# EAGLE board 7draft_onBoard (EAGLE 8.1.0)
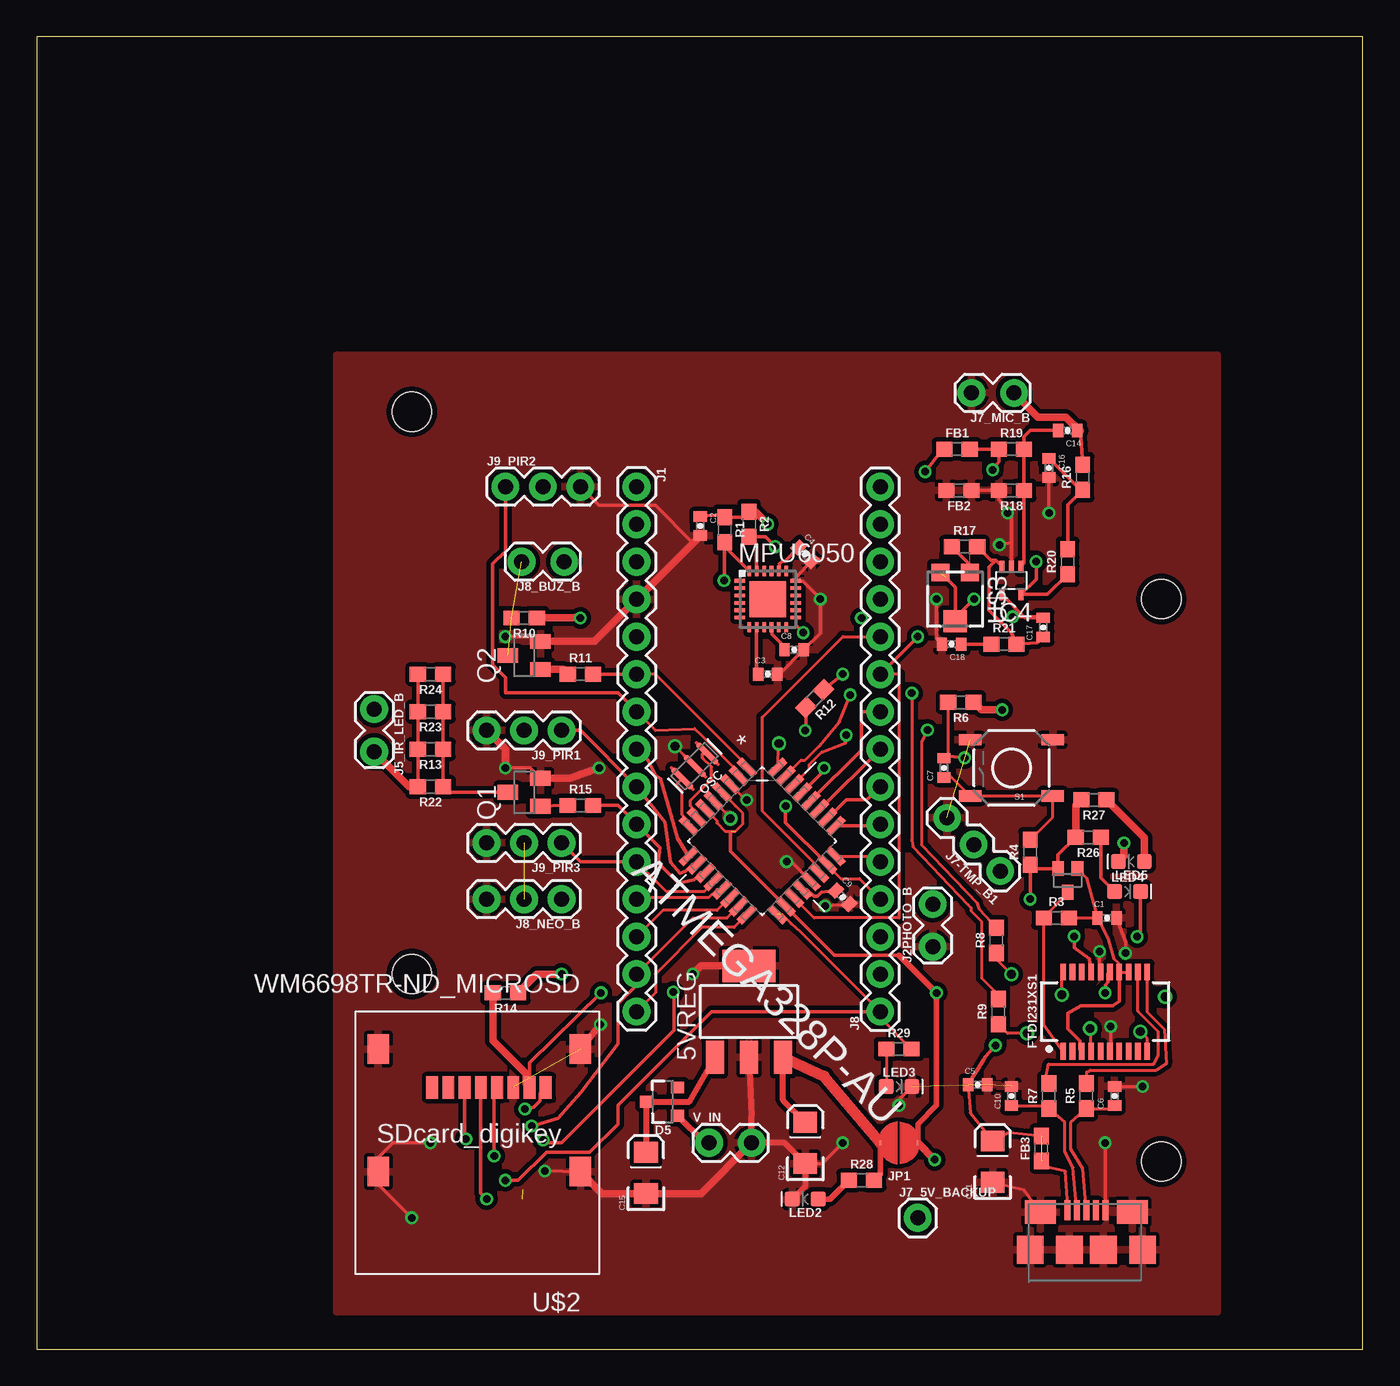
[diagram p0: board, top side]
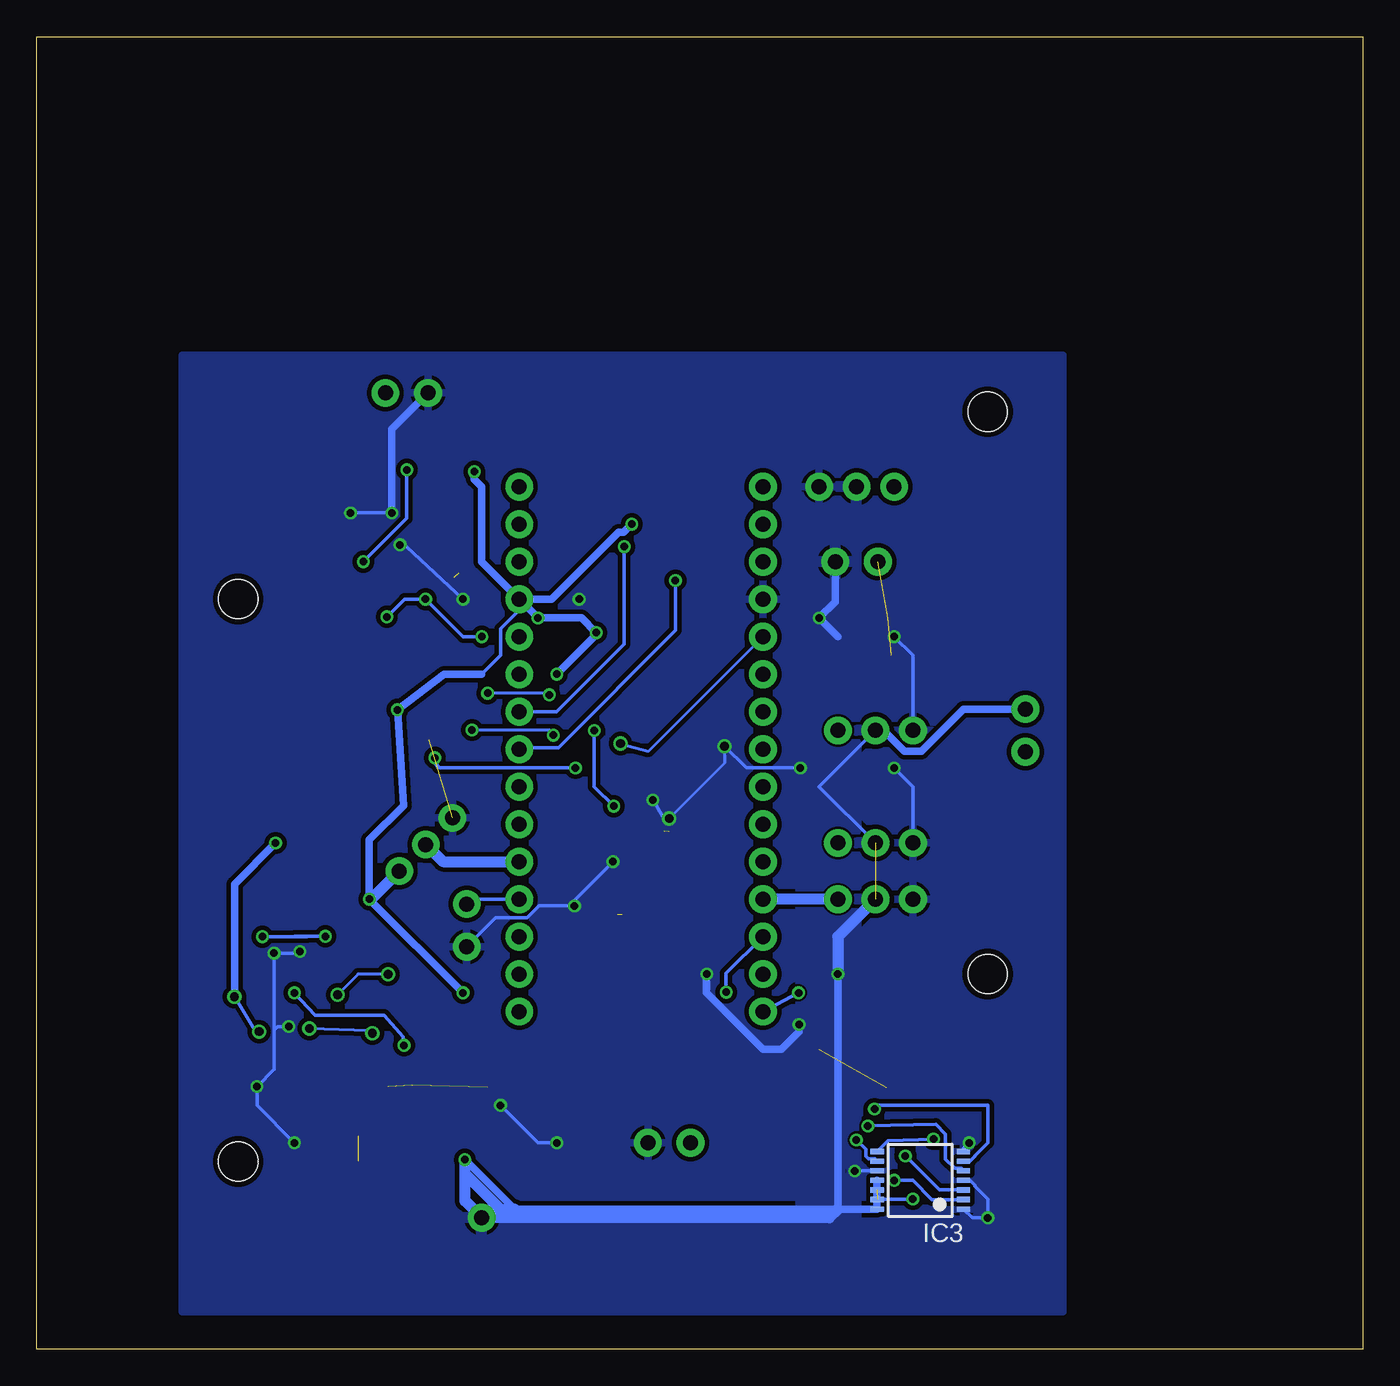
[diagram p1: board, bottom side, seen from below]

Size 89.84 x 88.89 mm. Coordinates in mm from the lower left corner, seen from the top.
Outline: 0,0 89.84,0 89.84,88.89 0,88.89 0,0
Copper layers (1*16): Top 0.0356mm / dielectric 1.5011mm / Bottom 0.0356mm
Design rules "OSHPARKLaenPCBOrder": minimum track width 6mil, minimum drill 13mil, track to track 6mil, track to pad 6mil, pad to pad 6mil, via to via 6mil, smd to smd 6mil, copper to edge 15mil, drill to drill 6mil, minimum pad ring 7mil, minimum via ring 7mil, stop-mask expansion 3mil, vias tented up to drill 0mil, thermal gap 10mil
Net classes: 0 default: clearance 0.051 mm
Holes 2.65 mm at 25.4,63.5 76.2,50.8 76.2,12.7 25.4,25.4

## Footprints (pad centres in the part's own frame; a part is rotated, then mirrored left to right if it is on the bottom)
SOT223 = smd 1.219 x 2.235: 1 -2.311,-3.099; 2 0,-3.099; 3 2.311,-3.099 | smd 3.6 x 2.2: 4 0,3.099
QFP80P900X900X120-32N = smd 1.473 x 0.508: 1 -4.242,2.794; 2 -4.242,2.007; 3 -4.242,1.194; 4 -4.242,0.406; 5 -4.242,-0.406; 6 -4.242,-1.194; 7 -4.242,-2.007; 8 -4.242,-2.794; 17 4.242,-2.794; 18 4.242,-2.007; 19 4.242,-1.194; 20 4.242,-0.406; 21 4.242,0.406; 22 4.242,1.194; 23 4.242,2.007; 24 4.242,2.794 | smd 0.508 x 1.473: 9 -2.794,-4.242; 10 -2.007,-4.242; 11 -1.194,-4.242; 12 -0.406,-4.242; 13 0.406,-4.242; 14 1.194,-4.242; 15 2.007,-4.242; 16 2.794,-4.242; 25 2.794,4.242; 26 2.007,4.242; 27 1.194,4.242; 28 0.406,4.242; 29 -0.406,4.242; 30 -1.194,4.242; 31 -2.007,4.242; 32 -2.794,4.242
0402-CAP = smd 0.7 x 0.9: 1 -0.65,0; 2 0.65,0
EIA3216 = smd 1.4 x 1.6: A 1.4,0; C -1.4,0
SOT23-3 = smd 0.8 x 0.9: 1 -0.95,-1; 2 0.95,-1; 3 0,1.1
0603 = smd 1.1 x 1: 1 -0.85,0; 2 0.85,0
SSOP20_L = smd 0.381 x 1.143: 1 -2.857,-2.68; 2 -2.223,-2.68; 3 -1.587,-2.68; 4 -0.953,-2.68; 5 -0.318,-2.68; 6 0.318,-2.68; 7 0.953,-2.68; 8 1.587,-2.68; 9 2.223,-2.68; 10 2.857,-2.68; 11 2.857,2.68; 12 2.223,2.68; 13 1.587,2.68; 14 0.953,2.68; 15 0.318,2.68; 16 -0.318,2.68; 17 -0.953,2.68; 18 -1.587,2.68; 19 -2.223,2.68; 20 -2.857,2.68
TSSOP14 = smd 0.35 x 0.9: 1 -1.95,-2.925; 2 -1.3,-2.925; 3 -0.65,-2.925; 4 0,-2.925; 5 0.65,-2.925; 6 1.3,-2.925; 7 1.95,-2.925; 8 1.95,2.925; 9 1.3,2.925; 10 0.65,2.925; 11 0,2.925; 12 -0.65,2.925; 13 -1.3,2.925; 14 -1.95,2.925
SC70-5 = smd 0.35 x 0.8: 1 -0.65,-0.95; 2 0,-0.95; 3 0.65,-0.95; 4 0.65,0.95; 5 -0.65,0.95
1X15 = drill 1.016 pad 1.88: 1 0,0; 2 2.54,0; 3 5.08,0; 4 7.62,0; 5 10.16,0; 6 12.7,0; 7 15.24,0; 8 17.78,0; 9 20.32,0; 10 22.86,0; 11 25.4,0; 12 27.94,0; 13 30.48,0; 14 33.02,0; 15 35.56,0
MICRO-USB-DIGIKEY-FCI2 = smd 0.4 x 1.35: D+ 0,2.67; D- -0.65,2.67; GND 1.3,2.67; ID 0.65,2.67; VCC -1.3,2.67 | smd 2.1 x 1.6: SHIELD -3.1,2.55; SHIELD1 3.1,2.55 | smd 1.8 x 1.9: SHIELD2 -3.8,0; SHIELD3 -1.15,0; SHIELD4 1.15,0; SHIELD5 3.8,0
1X02_LOCK = drill 1.016 pad 1.88: 1 -0.178,0; 2 2.718,0
1X03 = drill 1.016 pad 1.88: 1 0,0; 2 2.54,0; 3 5.08,0
1X01 = drill 1.016 pad 1.88: 1 0,0
SMT-JUMPER_2_NO_NO-SILK_ROUND = smd 0.152 x 0.305: 1 -1.27,0; 2 1.27,0
LED-0603 = smd 1 x 1: A -0.877,0; C 0.877,0
QFN24-4X4 = smd 0.7 x 0.25: 1 -1.9,1.25; 2 -1.9,0.75; 3 -1.9,0.25; 4 -1.9,-0.25; 5 -1.9,-0.75; 6 -1.9,-1.25; 13 1.9,-1.25; 14 1.9,-0.75; 15 1.9,-0.25; 16 1.9,0.25; 17 1.9,0.75; 18 1.9,1.25 | smd 0.25 x 0.7: 7 -1.25,-1.9; 8 -0.75,-1.9; 9 -0.25,-1.9; 10 0.25,-1.9; 11 0.75,-1.9; 12 1.25,-1.9; 19 1.25,1.9; 20 0.75,1.9; 21 0.25,1.9; 22 -0.25,1.9; 23 -0.75,1.9; 24 -1.25,1.9 | smd 2.45 x 2.45: EXP 0,0
RESONATOR-SMD-3.2X1.3 = smd 0.45 x 1.905: 1 -1.2,0; 2 0,0; 3 1.2,0
SOT23 = smd 1 x 1.4: 1 -0.95,-1.1; 2 0.95,-1.1; 3 0,1.1
TACTILE-SWITCH-SMD = smd 1.524 x 0.762: 1 -2.794,1.905; 2 2.794,1.905; 3 -2.794,-1.905; 4 2.794,-1.905
SOT323W_INFINEON = smd 1 x 0.8: 1 -0.8,0.65; 2 0.8,0; 3 -0.8,-0.65
MICROSD2 = smd 0.8 x 1.5: CD/DAT3/SS/CS 8.95,2.6; CLK 5.65,2.6; CMD 7.85,2.6; DAT0 3.45,2.6; DAT1 2.35,2.6; DAT2 10.05,2.6; VDD 6.75,2.6; VSS 4.55,2.6 | smd 1.45 x 2: GND 0,8.3; GND2 13.7,8.3; GND3 13.7,0; GND4 0,0
TC33X-2 = smd 1.2 x 1.2: 1 -1.8,1; 3 -1.8,-1 | smd 1.5 x 1.6: 2 1.5,0

## Placement (x,y rotation side)
5VREG  5v  [SOT223]  48.26,22.86 0 top
ATMEGA328P-AU  ATMEGA328P-AU  [QFP80P900X900X120-32N]  49.15,34.42 315 top
C1  .1uF  [0402-CAP]  72.52,29.21 0 top
C2  .1uF  [0402-CAP]  44.96,55.75 270 top
C3  10nF  [0402-CAP]  49.53,45.72 0 top
C4  2.2nF  [0402-CAP]  52.07,53.85 315 top
C5  .1uF  [0402-CAP]  63.75,17.91 0 top
C6  47pF  [0402-CAP]  73.03,17.14 90 top
C7  .1uF  [0402-CAP]  61.47,39.37 90 top
C8  .1uF  [0402-CAP]  51.31,47.37 0 top
C9  .01 uF  [0402-CAP]  54.61,30.61 315 top
C10  47pF  [0402-CAP]  66.04,17.14 90 top
C11  10uF  [EIA3216]  64.77,12.7 90 top
C12  10uF  [EIA3216]  52.07,13.97 90 top
C14  .01uF  [0402-CAP]  69.85,62.23 180 top
C15  47uF  [EIA3216]  41.27,11.94 90 top
C16  .1uF  [0402-CAP]  68.58,59.69 270 top
C17  100pF  [0402-CAP]  68.2,48.9 90 top
C18  10uF  [0402-CAP]  61.98,47.75 180 top
D5  700mA/40V/533mV  [SOT23-3]  42.42,16.76 90 top
FB1  30Ω/1.8A  [0603]  62.36,60.96 0 top
FB2  30Ω/1.8A  [0603]  62.48,58.17 180 top
FB3  30Ω/1.8A  [0603]  68.07,13.59 90 top
FTDI231XS1  FT231XS  [SSOP20_L]  72.39,22.86 0 top
IC3  74ABT125PW  [TSSOP14]  29.97,11.43 90 bottom
IC4  MAX4466KS  [SC70-5]  66.04,52.07 180 top
J1  [1X15]  40.64,58.42 270 top
J2  USB_MINI-B_DIGIKEY  [MICRO-USB-DIGIKEY-FCI2]  71.12,6.73 0 top
J2PHOTO_B  [1X02_LOCK]  60.71,27.43 90 top
J5_IR_LED_B  [1X02_LOCK]  22.86,43.18 270 top
J7-TMP_B1  [1X03]  65.28,32.38 135 top
J7_5V_BACKUP  [1X01]  59.69,8.89 0 top
J7_MIC_B  [1X02_LOCK]  66.04,64.77 180 top
J8  [1X15]  57.15,22.86 90 top
J8_BUZ_B  [1X02_LOCK]  35.56,53.34 180 top
J8_NEO_B  [1X03]  35.56,30.48 180 top
J9_PIR1  [1X03]  35.56,41.91 180 top
J9_PIR2  [1X03]  31.75,58.42 0 top
J9_PIR3  [1X03]  35.56,34.29 180 top
JP1  JUMPER-SMT_2_NO_NO-SILK_ROUND  [SMT-JUMPER_2_NO_NO-SILK_ROUND]  58.42,13.97 180 top
LED2  [LED-0603]  52.07,10.16 180 top
LED3  [LED-0603]  58.42,17.78 0 top
LED4  [LED-0603]  73.91,30.99 0 top
LED5  [LED-0603]  74.17,33.02 180 top
MPU6050  MPU-6050  [QFN24-4X4]  49.53,50.8 0 top
OSC  [RESONATOR-SMD-3.2X1.3]  44.58,39.5 225 top
Q1  NPN 40V 1A SOT-23  [SOT23]  33.02,37.72 90 top
Q2  [SOT23]  33.02,46.99 90 top
R1  10k  [0603]  46.61,55.5 270 top
R2  10k  [0603]  48.26,55.88 270 top
R3  10k  [0603]  69.09,29.21 0 top
R4  10k  [0603]  67.31,33.66 90 top
R5  27  [0603]  71.12,17.14 90 top
R6  10k  [0603]  62.61,43.81 180 top
R7  27  [0603]  68.58,17.14 90 top
R8  1k  [0603]  65.02,27.69 90 top
R9  1k  [0603]  65.15,22.86 90 top
R10  1k  [0603]  33.02,49.53 180 top
R11  1k  [0603]  36.83,45.72 0 top
R12  2.2K  [0603]  52.7,44.07 225 top
R13  470  [0603]  26.67,40.64 180 top
R14  10k  [0603]  31.75,24.13 180 top
R15  1k  [0603]  36.83,36.83 0 top
R16  1k  [0603]  70.87,59.05 90 top
R17  22k  [0603]  62.87,54.36 0 top
R18  1M  [0603]  66.04,58.17 180 top
R19  1M  [0603]  66.04,60.96 0 top
R20  1k  [0603]  69.85,53.34 90 top
R21  1k  [0603]  65.53,47.75 0 top
R22  470  [0603]  26.67,38.1 180 top
R23  470  [0603]  26.67,43.18 180 top
R24  470  [0603]  26.67,45.72 180 top
R26  1k  [0603]  71.25,34.67 180 top
R27  1k  [0603]  71.63,37.21 180 top
R28  1k  [0603]  55.88,11.43 0 top
R29  1k  [0603]  58.42,20.32 0 top
S1  TAC_SWITCHSMD  [TACTILE-SWITCH-SMD]  66.04,39.37 180 top
U$1  1N7002PW  [SOT323W_INFINEON]  69.85,31.75 270 top
U$2  WM6698TR-ND_MICROSD  [MICROSD2]  36.83,20.32 180 top
U$3  TC33X-2POT  [TC33X-2]  62.23,50.8 270 top
V_IN  [1X02_LOCK]  45.72,13.97 0 top

## Library data of the parts
5VREG = linear-technology; MPN: LT1129CST-5#PBF; OC_FARNELL: 1663375; OC_NEWARK: 57M2069
ATMEGA328P-AU = Atmega-328pu; DESCRIPTION: 8-bit Microcontroller with In-System Programmable Flash; MPN: ATMEGA328P-AU; OC_FARNELL: 1715486; OC_NEWARK: 14R4631; PACKAGE: TQFP-32; SUPPLIER: Atmel
C1-C10 C14 C16-C18 = SparkFun-Retired; PROD_ID: CAP-09885
C11 C12 C15 = SparkFun-Retired; PROD_ID: CAP-00811
D5 = SparkFun-DiscreteSemi; PROD_ID: DIO-08411
FB1-FB3 = SparkFun-Coils; PROD_ID: NDUC-07859
FTDI231XS1 = SparkFun-IC-Comms; PROD_ID: IC-11524
IC3 = 74xx-us
IC4 J2 MPU6050 U$1-U$3 = KevinKuwata1
J1 J2PHOTO_B J5_IR_LED_B J7-TMP_B1 J7_5V_BACKUP J7_MIC_B J8 J8_BUZ_B J8_NEO_B J9_PIR1-J9_PIR3 V_IN = SparkFun-Connectors
JP1 = SparkFun-Jumpers
LED2-LED5 = SparkFun-LED
OSC = SparkFun-Clocks
Q1 Q2 = semicon-smd-ipc
R1-R12 R14-R21 = SparkFun-Resistors; PROD_ID: RES-12535
R13 R22-R24 R26-R29 = SparkFun-Retired; PROD_ID: RES-09288
S1 = SparkFun-Retired; PROD_ID: SWCH-08247

## Nets
2.2NF: C4.1 MPU6050.20
3.3VFTDI: C1.1 FTDI231XS1.3 FTDI231XS1.13 FTDI231XS1.14 R3.2 U$1.1
5REGOUT: 5VREG.3 C12.A JP1.2 R28.2
5V: ATMEGA328P-AU.4 ATMEGA328P-AU.6 ATMEGA328P-AU.18 C2.1 FB1.1 IC3.11 IC3.12 IC3.13 IC3.14 J5_IR_LED_B.1 J7-TMP_B1.1 J7_5V_BACKUP.1 J8.12 J8_BUZ_B.1 J8_NEO_B.2 J9_PIR1.2 J9_PIR2.2 J9_PIR3.2 JP1.1 MPU6050.13 R1.1 R2.1 R4.1 R6.1 R10.1 R12.1 R14.1 R26.2 R27.2 U$1.3 U$2.VDD
10NF: C3.1 MPU6050.8
.UF: C8.1 MPU6050.10
A0: ATMEGA328P-AU.23 J2PHOTO_B.2 J8.4 R12.2
A1: ATMEGA328P-AU.24 J7-TMP_B1.2 J8.5
A2: ATMEGA328P-AU.25 J8.6
A3: ATMEGA328P-AU.26 J8.7
A6: ATMEGA328P-AU.19 C17.2 IC4.4 J8.10 U$3.2 U$3.3
A7: ATMEGA328P-AU.22 J8.11
ADO: MPU6050.9
AVCC: FB1.2 IC4.5 R19.1 R20.1
BUZ-: J8_BUZ_B.2 Q2.3 R10.2
D2: ATMEGA328P-AU.32 J1.5
D3: ATMEGA328P-AU.1 J1.6 R11.2
D4: ATMEGA328P-AU.2 J1.7 J9_PIR2.1
D5: ATMEGA328P-AU.9 J1.8
D6: ATMEGA328P-AU.10 J1.9 J9_PIR1.1
D7: ATMEGA328P-AU.11 J1.10 R15.2
D8: ATMEGA328P-AU.12 J1.11 J9_PIR3.1
D9: ATMEGA328P-AU.13 J1.12 J8_NEO_B.1
DAT1: IC3.6 U$2.DAT1
DN_N: C10.1 J2.D- R7.1
DN_P: C6.1 J2.D+ R5.1
DTR: C7.1 R4.2 S1.1 S1.2
DTR_FTDI: FTDI231XS1.1 R3.1 U$1.2
GND: 5VREG.2 5VREG.4 ATMEGA328P-AU.3 ATMEGA328P-AU.5 ATMEGA328P-AU.21 C1.2 C2.2 C3.2 C4.2 C5.2 C6.2 C8.2 C9.2 C10.2 C11.C C12.C C15.C C16.2 C18.2 FB2.1 FB2.2 FTDI231XS1.6 FTDI231XS1.16 IC3.1 IC3.4 IC3.7 IC3.10 IC4.2 J1.4 J2.GND J2.SHIELD J2.SHIELD1 J2.SHIELD2 J2.SHIELD3 J2.SHIELD4 J2.SHIELD5 J2PHOTO_B.1 J7-TMP_B1.3 J7_MIC_B.2 J8_NEO_B.3 J9_PIR1.3 J9_PIR2.3 J9_PIR3.3 LED2.C LED3.C MPU6050.18 OSC.2 Q1.2 Q2.2 R18.2 S1.3 S1.4 U$2.GND U$2.GND2 U$2.GND3 U$2.GND4 U$2.VSS V_IN.2
INT: MPU6050.12
IR_LED: Q1.1 R15.1
LED4: LED4.A R26.1
LED5: LED5.A R27.1
MIC_IN+: C14.2 IC4.1 R18.1 R19.2
MIC_IN_C14: C14.1 J7_MIC_B.1 R16.2
MICNET1K: C16.1 R16.1 R20.2
MISO: ATMEGA328P-AU.16 J1.15 R14.2 U$2.DAT0
MOSI: ATMEGA328P-AU.15 IC3.5 J1.14
N$1: J5_IR_LED_B.2 R13.2 R22.2 R23.2 R24.2
N$2: Q1.3 R13.1 R22.1 R23.1 R24.1
N$4: LED3.A R29.1
N$6: ATMEGA328P-AU.20 C9.1
N$12: R17.1 U$3.1
N$20: Q2.1 R11.1
N$22: D5.1 V_IN.1
N$29: C18.1 R21.1
N$30: C17.1 IC4.3 R17.2 R21.2
PB6: ATMEGA328P-AU.7 OSC.1
PB7: ATMEGA328P-AU.8 OSC.3
POWERLED: LED2.A R28.1
RESET: ATMEGA328P-AU.29 C7.2 R6.2
RX: FTDI231XS1.4 R9.1
RXLED: FTDI231XS1.17 LED4.C
SCK: ATMEGA328P-AU.17 IC3.2 J8.1 R29.2
SCK_BUFF: IC3.3 U$2.CLK
SCL: ATMEGA328P-AU.28 J8.9 MPU6050.23 R2.2
SDA: ATMEGA328P-AU.27 J8.8 MPU6050.24 R1.2
SS: ATMEGA328P-AU.14 IC3.9 J1.13
SS_BUFF: IC3.8 U$2.CMD
TX: FTDI231XS1.20 R8.1
TX-O_N: ATMEGA328P-AU.30 R8.2
TX-O_P: ATMEGA328P-AU.31 R9.2
TXLED: FTDI231XS1.10 LED5.C
USBD_N: FTDI231XS1.12 R7.2
USBD_P: FTDI231XS1.11 R5.2
VIN: 5VREG.1 C15.A D5.3
VUSB: C5.1 C11.A FB3.1 FB3.2 FTDI231XS1.15 J2.VCC

## Tracks (layer width: path | path; a pad name or v marks a point on that pad's centre or on a via)
2.2NF
  Top 0.254: MPU6050.20 50.33,52.74 50.33,53.19 50.52,53.38 50.68,53.38 C4.1
3.3VFTDI
  Top 0.203: FTDI231XS1.13 FTDI231XS1.14 73.34,26.1 73.02,26.42 72.63,27.69 C1.1 | R3.2 C1.1 | U$1.1 71.11,31.95 C1.1
  Top 0.229: 70.67,20.77 70.8,20.64 FTDI231XS1.3 70.67,20.31 70.67,20.88 69.85,21.71 69.85,22.73 70.74,23.24 72.9,23.24 73.34,23.56 FTDI231XS1.14
5REGOUT
  Top 0.381: JP1.2 57.15,11.85 R28.2
  Top 0.406: C12.A 50.57,16.87 5VREG.3
  Top 0.762: JP1.2 53.34,18.49 5VREG.3
5V  (via drill 0.51)  (3 unrouted)
  Top 0.203: ATMEGA328P-AU.4 47.34,36.8 47.35,36.8 47.85,36.3 47.85,35.59 47.35,35.08 46.63,35.08 46.08,35.64 46.08,35.8 ATMEGA328P-AU.6
  Top 0.229: v67.31,30.48 R4.1 67.56,32.55 U$1.3 69.2,33.47 R26.2 | 63.5,43.81 R6.1 | U$2.VDD 30.08,10.56 v30.48,10.16 | v60.2,59.44 60.96,60.41 FB1.1
  Top 0.254: 58.42,26.67 54.06,26.67 ATMEGA328P-AU.18 46.99,33.74 46.99,35.06 | R2.1 47.88,56.35 R1.1 46.43,56.53 C2.1 | MPU6050.13 51.43,49.04 v51.93,48.53 | R12.1 v54.61,45.72
  Top 0.381: JP1.1 59.69,15.24 60.96,16.51 v60.96,24.13 58.42,26.67
  Top 0.508: R2.1 48.68,56.73 v49.53,55.88 | v60.83,12.83 JP1.1 | v36.83,49.53 R10.1 | v65.41,43.31 64.01,43.31 63.5,43.81 | R14.1 33.87,25.4 v35.56,25.4 | R27.2 70.4,36.83 R26.2
  Bottom 0.229: v30.48,10.16 32.87,10.16 IC3.13 | J8.12 57.15,50.04 58.41,48.78 58.41,47 59.69,45.72
  Bottom 0.254: J9_PIR3.2 36.83,38.1 J9_PIR1.2
  Bottom 0.508: J8.12 v55.88,49.53 52.93,49.53 v51.93,48.53 51.93,48.4 v54.61,45.72 | v49.53,55.88 50.09,55.32 50.44,55.32 54.96,50.8 J8.12 | IC3.11 IC3.13 IC3.14 35.56,9.48 | 35.56,9.48 57.49,9.48 v60.83,12.83 | v35.56,25.4 35.56,9.48 | 35.56,48.26 v36.83,49.53 35.74,50.62 J8_BUZ_B.1 | 59.69,45.72 62.23,45.72 v65.41,43.31 65,36.82 67.31,34.51 v67.31,30.48 v60.96,24.13 | J8.12 59.69,53.34 59.69,58.42 60.2,58.93 v60.2,59.44 | J5_IR_LED_B.1 27.06,43.36 29.9,40.51 31.06,40.51 32.46,41.91 J9_PIR1.2
  Bottom 0.762: J7_5V_BACKUP.1 59.1,9.48 58.42,9.48 | 58.42,9.48 57.49,9.48 | 35.56,9.48 36.15,8.89 J7_5V_BACKUP.1 | 58.42,9.48 60.83,11.89 v60.83,12.83 60.83,10.03 J7_5V_BACKUP.1 | J8_NEO_B.2 35.56,27.94 v35.56,25.4 | J7-TMP_B1.1 67.18,30.48 v67.31,30.48
  pour Bottom: 34.29,58.42 38.1,58.42 38.1,8.89 63.5,8.89 63.5,5.08 34.29,5.08
10NF
  Top 0.254: MPU6050.8 48.78,45.72 C3.1
.UF
  Top 0.254: MPU6050.10 49.83,48.85 49.83,48.41 50.66,47.58 C8.1
A0  (via drill 0.51)
  Top 0.203: ATMEGA328P-AU.23 53.57,32.79 54.48,31.88 55.75,31.88 J8.4
  Top 0.254: ATMEGA328P-AU.23 50.74,35.66 v50.74,36.77 | v52.07,41.91 arc90 52.1,41.94 R12.2
  Bottom 0.254: J2PHOTO_B.2 60.38,30.48 J8.4 | v50.74,36.77 52.07,38.1 v52.07,41.91
A1
  Top 0.203: ATMEGA328P-AU.24 56.78,33.39 J8.5
  Bottom 0.762: J7-TMP_B1.2 62.32,33.02 J8.5
A2
  Top 0.254: ATMEGA328P-AU.25 57.03,35.44 J8.6
A3
  Top 0.254: ATMEGA328P-AU.26 53.65,36 54.86,37.21 56.26,37.21 J8.7
A6  (via drill 0.51)  (1 unrouted)
  Top 0.203: J8.10 58.42,45.72 58.42,29.21 52.67,29.21 ATMEGA328P-AU.19
  Top 0.229: 61.55,52.28 62.23,51.6 U$3.2 62.23,49.53 v63.5,50.8 | IC4.4 66.97,49.55 C17.2 68.14,49.61 v66.12,49.61 | J8.10 v59.69,48.26
  Bottom 0.229: v66.12,49.61 64.92,50.8 v63.5,50.8 60.96,48.26 v59.69,48.26
A7
  Top 0.203: ATMEGA328P-AU.22 52.99,32.62 49.17,36.45 49.17,42.82 54.61,48.26 J8.11
AVCC  (via drill 0.51)
  Top 0.229: FB1.2 R19.1 65.19,60.11 v64.77,59.56 | R20.1 68.48,51.12 IC4.5 67.72,52.15 v67.72,53.34
  Bottom 0.229: v67.72,53.34 64.77,56.28 v64.77,59.56
BUZ-  (2 unrouted)
D2  (via drill 0.6)
  Top 0.203: ATMEGA328P-AU.32 50.19,39.39 v50.29,41.02
  Bottom 0.203: v50.29,41.02 48.39,40.51 J1.5
D3
  Top 0.203: ATMEGA328P-AU.1 48.12,39.51 41.91,45.72 J1.6
  Top 0.254: J1.6 R11.2
D4
  Top 0.203: ATMEGA328P-AU.2 47.55,38.86 47.55,39.08 44.96,41.67 44.58,42.04 41.91,41.91 J1.7
  Top 0.254: J1.7 39.37,44.45 31.75,44.45 31.75,45.49 30.89,46.35 30.89,53.18 31.75,54.04 J9_PIR2.1
D5
  Top 0.254: ATMEGA328P-AU.9 43.41,34.62 42.89,36.41 42.25,38.65 41.91,38.86 41.4,39.88 J1.8
D6
  Top 0.254: ATMEGA328P-AU.10 44.44,32.84 43.97,32.36 43.57,32.24 42.94,32.99 42.56,35.67 J1.9 36.83,41.91 J9_PIR1.1
D7
  Top 0.229: R15.2 39.37,36.83 J1.10
  Top 0.254: ATMEGA328P-AU.11 44.98,32.26 44.53,31.81 43.48,31.55 42.1,32.93 42.23,33.97 J1.10
D8
  Top 0.203: ATMEGA328P-AU.12 45.86,31.64 45.21,30.99 42.67,30.99 J1.11
  Top 0.254: J9_PIR3.1 36.83,33.02 J1.11
D9
  Top 0.203: ATMEGA328P-AU.13 46.08,31.13 45.53,30.58 40.74,30.58 J1.12
  Bottom 0.762: J8_NEO_B.1 J1.12
DAT1  (via drill 0.51)
  Top 0.229: U$2.DAT1 34.1,17.34 34.1,16.84 33.65,16.39 v33.08,16.26
  Bottom 0.229: IC3.6 26.62,12.73 26.28,13.07 26.28,13.09 25.4,13.97 25.4,16.51 33.02,16.51 33.02,16.33 v33.08,16.26
DN_N
  Top 0.203: J2.D- 70.22,12.3 69.65,13.38 69.65,15.36 R7.1 68.38,16.5 C10.1
DN_P
  Top 0.203: J2.D+ 70.87,12.22 70.05,13.55 70.05,15.36 R5.1 72.83,16.3 C6.1
DTR
  Top 0.203: R4.2 68.83,36.03 S1.1 S1.2 61.99,38.72 C7.1
DTR_FTDI
  Top 0.203: FTDI231XS1.1 68.24,21.98 R3.1 U$1.2
GND  (via drill 0.51, 0.6)  (4 unrouted)
  Top 0.203: C11.C 66.89,10.79 J2.SHIELD | v43.23,40.84 OSC.2 | v46.99,35.94 46.99,36 ATMEGA328P-AU.5 | ATMEGA328P-AU.3 48.06,37.19 v48.1,37.19
  Top 0.229: C12.C 53.21,12.57 v54.61,13.97 | v58.42,16.51 58.42,16.9 LED3.C | v34.42,12.06 U$2.GND | C9.2 v53.41,30.02 | v50.8,33.02 51.12,33.02 ATMEGA328P-AU.21 | R18.2 FB2.1 | 65.19,58 R18.2 | C16.2 v68.58,56.64 | R18.2 65.19,57.57 v65.79,56.64 66.04,56.39 66.04,54.61 | 66.04,54.61 IC4.2 | C18.2 60.96,48.12 v60.96,50.8 | v65.23,54.48 66.04,54.61 | FTDI231XS1.16 72.01,25.6 v72.01,26.93 | v73.77,26.82 73.8,27.55 C1.2 | C6.2 v74.93,17.78 | FTDI231XS1.6 72.77,20.24 v72.77,21.84 | J2.GND 72.39,9.43 v72.39,13.97 | v25.4,8.89 23.13,11.16 U$2.GND2 23.13,12.97 24.13,13.97 v26.67,13.97
  Top 0.254: C4.2 51.43,52.29 MPU6050.18 51.48,52.01 51.92,52.01 53.09,50.83 | C3.2 50.31,45.72 C8.2 53.09,48.51 v53.09,50.8 | Q2.2 33.8,48.26 v31.75,48.26 | J9_PIR2.3 38.1,57.15 41.91,57.15 44.46,54.6 | Q1.2 33.42,39.37 v31.75,39.37
  Top 0.381: C12.C 52.07,11.04 LED2.C
  Top 0.406: 5VREG.2 48.44,15.77 V_IN.2 50.67,13.97 C12.C
  Top 0.508: C2.2 44.46,54.6 40.66,50.8 J1.4 37.78,47.94 Q2.2 | V_IN.2 45.01,10.54 C15.C 38.31,10.54 U$2.GND | Q1.2 36.13,38.67 v38.1,39.37 | 5VREG.4 45.01,25.96 v44.45,25.4 | v38.2,22 36.85,20.34 U$2.GND4 | 53.09,50.83 v53.09,50.8 | J9_PIR1.3 31.75,40.64 v31.75,39.37
  Bottom 0.203: v43.23,40.84 43.23,39.7 v46.99,35.94 47.35,35.94 v48.1,37.19
  Bottom 0.229: v54.61,13.97 55.88,13.97 v58.42,16.51 | IC3.10 v34.42,12.06 | v53.41,30.02 53.41,30.41 v50.8,33.02 | v65.79,56.64 v68.58,56.64 | v60.96,50.8 64.77,54.36 v65.23,54.48 | v38.1,39.37 41.76,39.37 v43.23,40.84 | v72.01,26.93 72.12,26.82 v73.77,26.82 73.77,21.59 | 73.77,21.59 73.77,18.94 v74.93,17.78 74.93,16.51 v72.39,13.97 | 73.77,21.59 73.51,21.84 v72.77,21.84 | IC3.1 26.46,8.89 v25.4,8.89 25.4,10.16 26.28,11.04 26.28,11.09 26.62,11.43 IC3.4 | IC3.7 27.05,13.59 v26.67,13.97
  Bottom 0.254: v31.75,48.26 30.48,46.99 J9_PIR1.3 | J2PHOTO_B.1 58.75,29.21 56.62,29.21 55.81,30.02 v53.41,30.02 | v31.75,39.37 30.48,38.1 J9_PIR3.3
  Bottom 0.508: v38.2,22 38.2,21.49 39.37,20.32 40.64,20.32 44.45,24.13 v44.45,25.4 | J7_MIC_B.2 65.79,62.31 v65.79,56.64
  pour Bottom (isolate 0.305): 20.32,2.54 20.32,67.31 80.01,67.31 80.01,2.54
  pour Top (isolate 0.305): 20.32,2.54 80.01,2.54 80.01,67.31 20.32,67.31
IR_LED
  Top 0.229: R15.1 35.71,36.83 Q1.1
LED4
  Top 0.229: R26.1 72.1,31.93 LED4.A
LED5
  Top 0.508: R27.1 75.05,34.64 LED5.A
MIC_IN+
  Top 0.229: C14.2 67.31,62.23 66.89,61.81 R19.2 R18.1 66.89,53.22 IC4.1
MIC_IN_C14
  Top 0.229: R16.2 70.7,62.2 70.7,62.23 C14.1
  Top 0.508: 70.7,62.2 70.68,62.2 69.74,63.14 67.85,63.14 J7_MIC_B.1
MICNET1K
  Top 0.229: C16.1 70.72,58.2 R16.1 69.85,57.19 R20.2
MISO  (via drill 0.51)
  Top 0.203: ATMEGA328P-AU.16 48.11,29.44 47.24,28.57 45.09,28.57 41.91,25.4 41.91,24.13 J1.15
  Top 0.229: U$2.DAT0 33.38,19.41 v38.23,24.13
  Top 0.508: U$2.DAT0 33.14,17.96 33.14,18.66 30.9,20.9 R14.2
  Bottom 0.229: v38.23,24.13 J1.15
MOSI  (via drill 0.51)
  Top 0.203: ATMEGA328P-AU.15 46.78,29.21 44.45,29.21 J1.14
  Top 0.229: v33.53,15.11 33.66,15.11 35.32,15.64 36.86,17.41 39.38,20.7 39.38,23.38 40.64,24.64 J1.14
  Bottom 0.229: IC3.5 27.2,12.24 27.63,12.24 28.26,12.87 28.26,14.57 28.93,15.24 v33.53,15.11
N$1
  Top 0.229: R24.2 R23.2 R13.2 R22.2
  Top 0.508: J5_IR_LED_B.2 25.22,38.1 R22.2
N$2
  Top 0.229: R22.1 R13.1 R23.1 R24.1
  Top 0.254: R22.1 27.9,37.72 Q1.3
N$4
  Top 0.203: R29.1 57.57,17.81 LED3.A
N$6
  Top 0.229: ATMEGA328P-AU.20 52.2,31.13 52.65,30.69 52.91,30.69 53.16,30.94 C9.1
N$12
  Top 0.229: U$3.1 63.23,53.14 R17.1
N$20
  Top 0.508: Q2.1 35.66,46.04 R11.1
N$22
  Top 0.406: D5.1 45.26,13.97 V_IN.1
N$29
  Top 0.229: R21.1 C18.1
N$30
  Top 0.229: 64.98,53.43 IC4.3 | 64.98,53.43 64.52,52.96 64.52,50.04 66.04,48.51 R21.2 67.79,47.84 C17.1 | R17.2 64.64,53.43 64.98,53.43
PB6
  Top 0.203: ATMEGA328P-AU.7 44.73,36.36 44.3,36.79 44.3,37.17 45.73,38.6 45.73,39.16 45.72,39.17 45.72,39.44 45.12,40.04 45.12,40.35 OSC.1
PB7
  Top 0.203: ATMEGA328P-AU.8 44.17,35.76 43.73,36.21 43.73,37.8 43.3,38.22 OSC.3
POWERLED
  Top 0.381: LED2.A 53.76,10.16 R28.1
RESET  (via drill 0.51)
  Top 0.203: C7.2 61.76,40.31 R6.2
  Top 0.254: ATMEGA328P-AU.29 53.34,39.18 v53.34,39.37 | v62.87,40.06 61.81,40.15 C7.2
  Bottom 0.254: v53.34,39.37 62.61,39.37 63.04,40.06 v62.87,40.06
RX  (via drill 0.6)
  Top 0.203: FTDI231XS1.4 71.44,21.27 v71.37,21.72 | v67.11,21.39 65.77,21.39 R9.1
  Bottom 0.203: v71.37,21.72 67.31,21.59 v67.11,21.39
RXLED  (via drill 0.51)
  Top 0.229: LED4.C 74.79,27.95 v74.55,27.94 | FTDI231XS1.17 71.31,26.43 70.29,27.2 v70.29,27.96 70.3,27.95 70.36,27.95
  Bottom 0.229: 72.39,27.94 v74.55,27.94 | 72.39,27.94 71.53,27.94 | v70.29,27.96 72.36,27.96 72.39,27.94
SCK  (via drill 0.51)  (1 unrouted)
  Top 0.203: 50.5,29.44 51.13,28.8 51.71,28.3 J8.1 57.15,22.44 R29.2
  Top 0.229: v31.74,11.43 32.62,11.43 34.52,13.34 37.47,13.34 39.37,15.24 39.37,16.51 45.72,22.86 J8.1
  Bottom 0.229: IC3.2 29.18,10.13 30.48,11.43 v31.74,11.43
SCK_BUFF  (via drill 0.51)
  Top 0.229: U$2.CLK 30.99,17.53 v30.99,13.08
  Bottom 0.229: v30.99,13.08 28.69,10.78 IC3.3
SCL  (via drill 0.51)
  Top 0.254: ATMEGA328P-AU.28 55.88,40.57 55.88,43.18 J8.9 | MPU6050.23 48.78,54.51 R2.2 49.36,55.03 v50.04,54.36
  Bottom 0.254: v50.04,54.36 50.04,47.75 54.61,43.18 J8.9
SDA  (via drill 0.51)
  Top 0.254: ATMEGA328P-AU.27 53.08,36.57 J8.8 | MPU6050.24 46.61,54.37 R1.2 46.61,52.11 v46.57,52.07
  Bottom 0.254: J8.8 57.04,40.75 54.5,40.75 46.57,48.68 v46.57,52.07
SS  (via drill 0.51)
  Top 0.203: ATMEGA328P-AU.14 46.96,30.57 46.1,29.72 42.42,29.72 J1.13
  Top 0.229: v43.13,24.18 43.18,24.13 43.18,21.59 35.56,13.97 34.29,13.97 34.3,13.98 v34.3,14.16
  Bottom 0.229: J1.13 43.13,25.45 v43.13,24.18 | v34.3,14.16 33.66,13.53 33.66,13.07 33.48,12.89 33.05,12.89 IC3.9
SS_BUFF  (via drill 0.51)
  Top 0.229: v29.08,14.22 28.98,14.38 U$2.CMD
  Bottom 0.229: IC3.8 32.18,14.1 v29.08,14.22
TX  (via drill 0.6)
  Top 0.203: R8.1 65.02,26.42 v66.04,25.4 | v69.47,24 69.47,25.48 FTDI231XS1.20
  Bottom 0.203: v66.04,25.4 68.07,25.4 v69.47,24
TX-O_N  (via drill 0.51)
  Top 0.203: ATMEGA328P-AU.30 52.34,39.3 52.34,39.61 53.17,40.44 54.82,41.07 v54.85,41.59 | v60.35,41.94 59.94,41.15 59.94,34.16 63.7,30.23 63.83,29.84 R8.2
  Bottom 0.203: v54.85,41.59 55.07,41.94 v60.35,41.94
TX-O_P  (via drill 0.51)
  Top 0.203: ATMEGA328P-AU.31 51.79,39.9 52.05,39.9 53,40.84 54.4,42.49 v55.12,44.32 | v59.29,44.43 59.29,34.48 59.36,34.04 63.1,30.1 | 63.1,30.1 63.3,29.9 63.3,29.84 | 63.1,30.1 63.3,29.91 63.3,29.68 64.01,28.96 64.01,25.15 65.15,24 R9.2
  Bottom 0.203: v55.12,44.32 55.23,44.43 v59.29,44.43
TXLED  (via drill 0.51, 0.6)
  Top 0.203: FTDI231XS1.10 75.25,21.04 v74.78,21.51
  Top 0.508: LED5.C 73.66,33.39 v73.66,34.29
  Bottom 0.203: v74.78,21.51 75.01,21.51 v76.45,23.88
  Bottom 0.508: v73.66,34.29 76.45,31.5 v76.45,23.88
USBD_N
  Top 0.203: FTDI231XS1.12 74.61,22.89 76,21.51 76,19.86 75.69,19.3 68.55,19.3 68.38,18.38 R7.2
USBD_P
  Top 0.203: FTDI231XS1.11 75.25,22.83 76.4,21.67 76.53,19.31 75.86,18.9 71.38,18.9 71.12,18.76 R5.2
VIN
  Top 0.406: C15.A 41.32,13.38 D5.3 44.22,16.76 5VREG.1
VUSB  (via drill 0.51)  (1 unrouted)
  Top 0.203: FB3.1 68.65,12.29 69.7,12.04 69.82,10.14 J2.VCC | FB3.2 65.87,14.69 C11.A 63.26,16.02 C5.1
  Top 0.229: FTDI231XS1.15 72.58,25.41 72.58,24.84 72.39,24.65 v72.39,24.13 | v64.96,20.57 64.77,20.38 64.26,19.81 64.14,19.56 C5.1
  Bottom 0.229: v72.39,24.13 70.99,22.61 66.29,22.61 65.02,21.15 v64.96,20.57